# Altium PCB radin_rafatpanah.PcbDoc
Units mm, origin at the board's own origin, x right, y up, seen from the top; angles counter-clockwise.
Board outline 104.78 x 63.25 mm, 2 copper layers (Top Layer, Bottom Layer); 28 components, 23 nets, 114 pads, 12 vias.
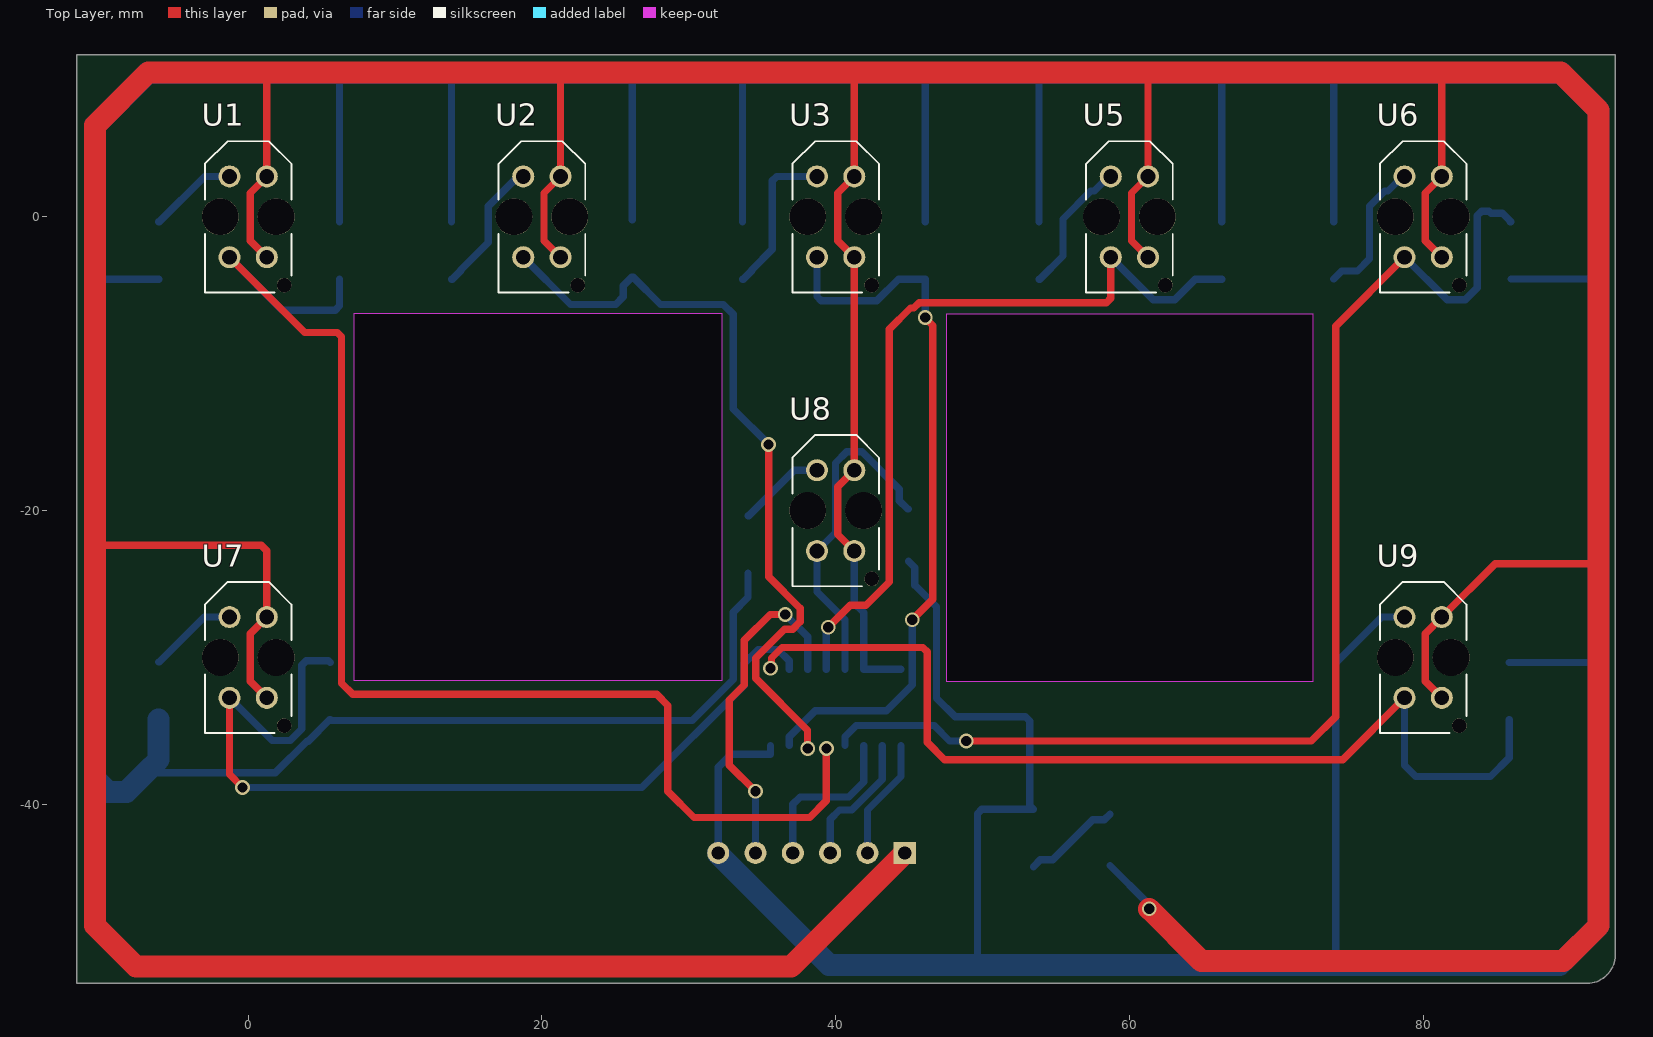
[diagram p0: Top Layer view]
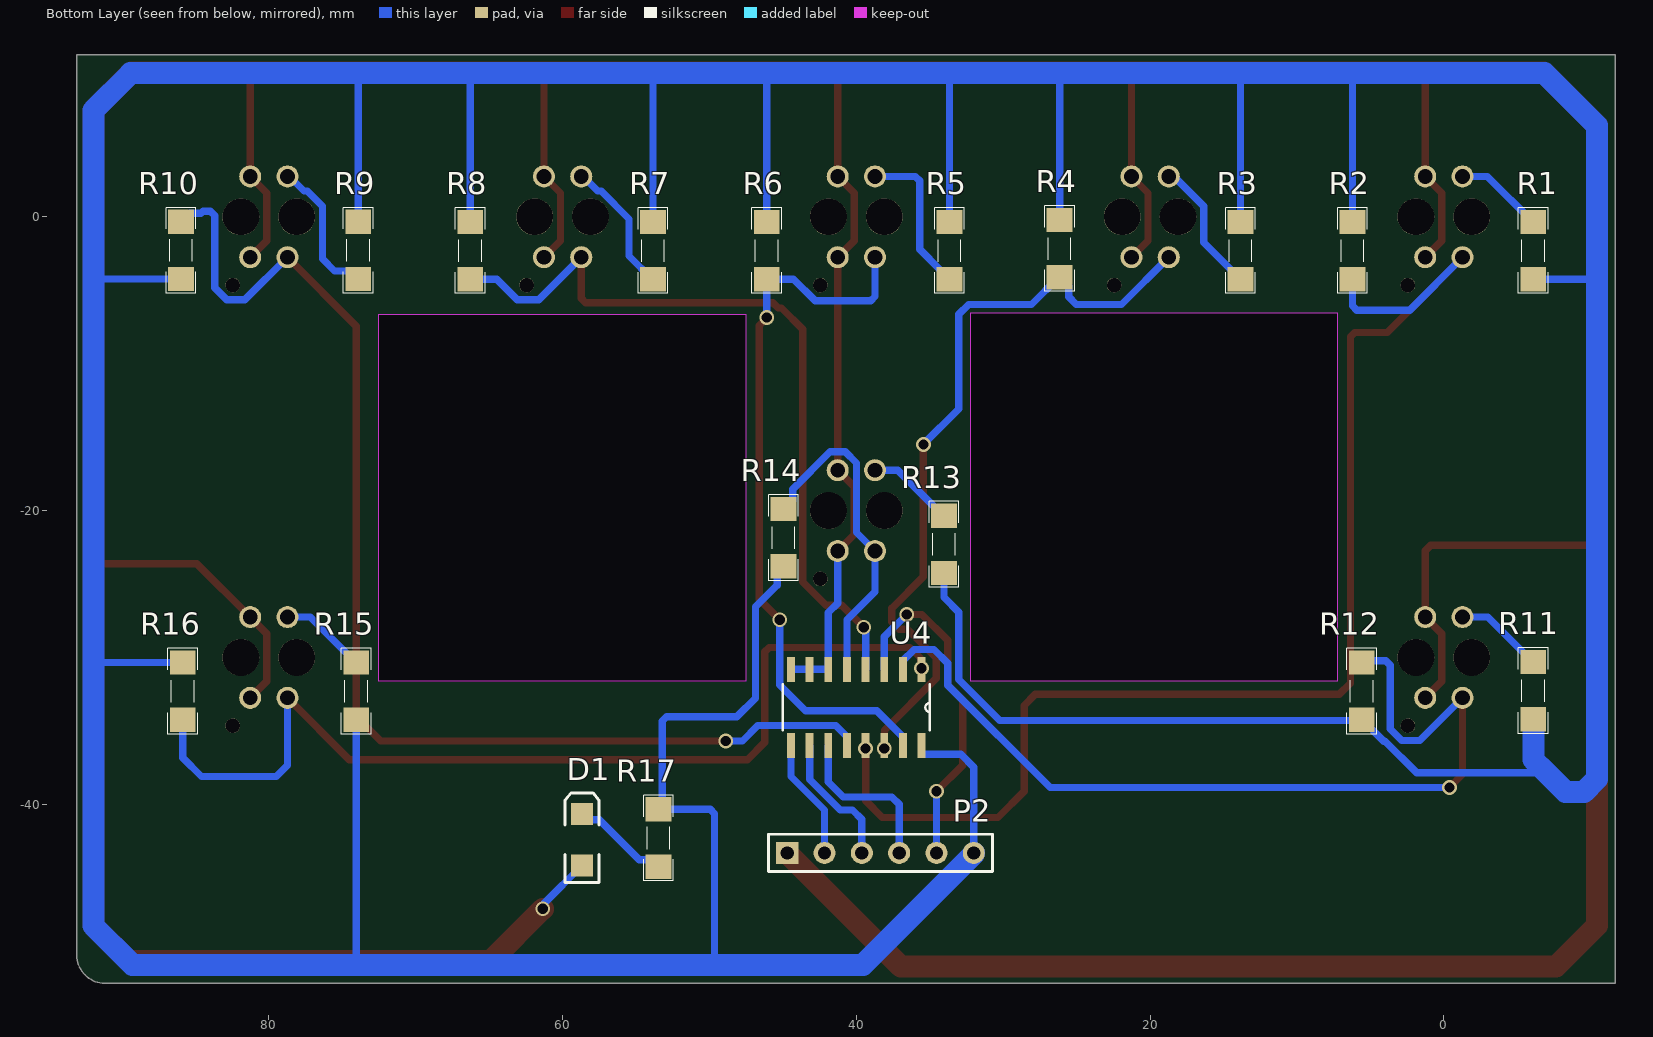
[diagram p1: Bottom Layer view, seen from below]
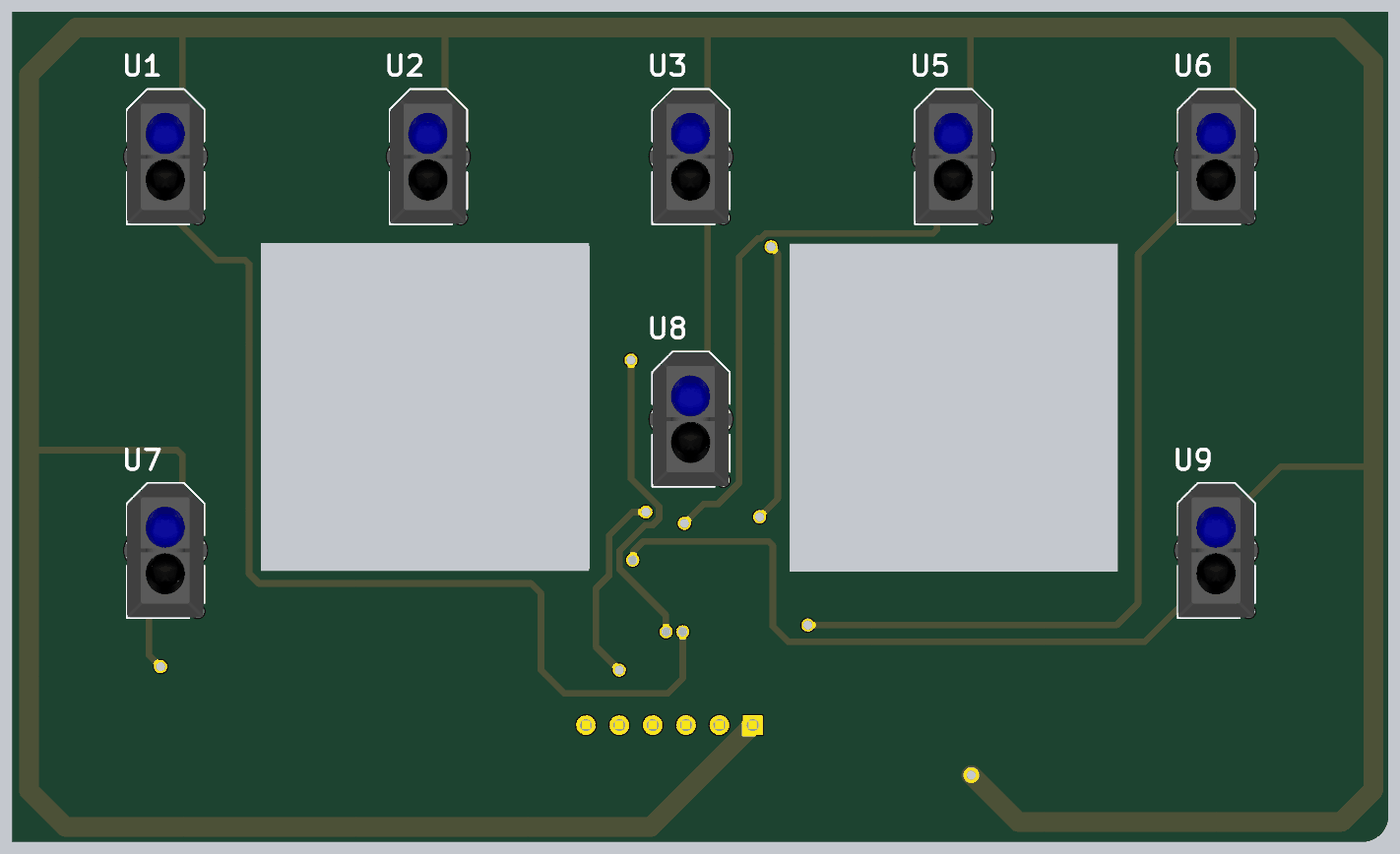
[diagram p2: 3D render of the assembled board from above, using the file's embedded part models]
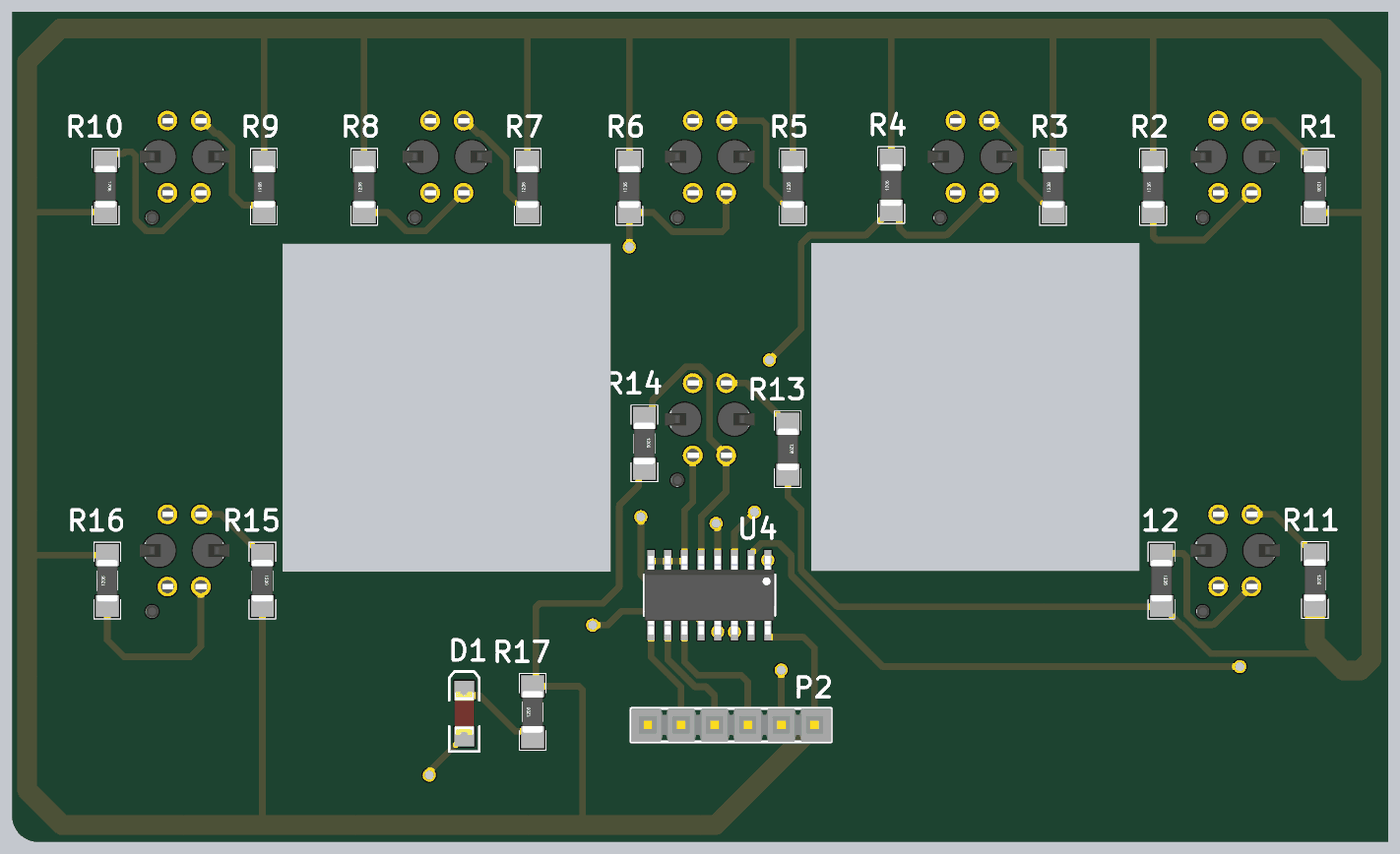
[diagram p3: 3D render of the assembled board from below, using the file's embedded part models]

## Layer stack, top to bottom
Top Solder: solder mask 0.0102, Solder Resist, Dk 3.5
Top Layer: signal copper 0.0356
Dielectric 1: dielectric 0.32, FR-4, Dk 4.8
Bottom Layer: signal copper 0.0356
Bottom Solder: solder mask 0.0102, Solder Resist, Dk 3.5

## Board outline
-11.684,-52.197 -11.684,11.049 93.091,11.049 93.091,-50.29 cw(c91.11,-50.216) 91.184,-52.197
cut-out: 47.517,-31.623 72.517,-31.623 72.517,-6.623 47.517,-6.623
cut-out: 32.239,-31.571 7.239,-31.571 7.239,-6.571 32.239,-6.571

## Design rules (kind name [scope] priority, off if disabled: settings)
Clearance [All] p1: gap=0.254 ignorepadtopadclearanceinfootprint=FALSE except(0: Arc-Hole Track-Hole SMDPad-Hole THPad-Hole Via-Hole Fill-Hole Poly-Hole Region-Hole Text-Hole)
PolygonConnect [All] p1: connectstyle=Relief reliefconductorwidth=0.254 reliefentries=4 polygonreliefangle="90 Angle" airgapwidth=0.254
RoutingVias [All] p1: holewidth=0.711 width=1.27 viastyle="Through Hole" minholewidth=0.711 minwidth=1.27 maxholewidth=0.711 maxwidth=1.27
SolderMaskExpansion [All] p1: expansion=0.102 istentingtop=FALSE
Width [All] p1: maxlimit=2 minlimit=0.5 preferedwidth=1
30 further rules are at their usual default settings.

## Components (designator, comment, footprint, x,y, rotation, side; value= is the part's Value field where it differs from the comment)
D1 "SMD 1206 LED" "LED 1206" 58.674,-42.418 r90 bottom
P2 "Header 6" HDR1X6 44.704,-43.307 r180 bottom
R1 "1K" RESC4817X04N -6.096,-2.296 r270 bottom
R2 "1K" RESC4817X04N 6.223,-2.296 r90 bottom
R3 "1K" RESC4817X04N 13.843,-2.296 r90 bottom
R4 "1K" RESC4817X04N 26.162,-2.159 r90 bottom
R5 "1K" RESC4817X04N 33.655,-2.296 r90 bottom
R6 "1K" RESC4817X04N 46.101,-2.296 r90 bottom
R7 "1K" RESC4817X04N 53.848,-2.296 r90 bottom
R8 "1K" RESC4817X04N 66.294,-2.296 r90 bottom
R9 "1K" RESC4817X04N 73.914,-2.286 r90 bottom
R10 "1K" RESC4817X04N 85.979,-2.286 r270 bottom
R11 "1K" RESC4817X04N -6.096,-32.258 r270 bottom
R12 "1K" RESC4817X04N 5.588,-32.296 r270 bottom
R13 "1K" RESC4817X04N 34.036,-22.296 r270 bottom
R14 "1K" RESC4817X04N 44.958,-21.844 r270 bottom
R15 "1K" RESC4817X04N 74.041,-32.296 r270 bottom
R16 "1K" RESC4817X04N 85.852,-32.296 r90 bottom
R17 "1K" RESC4817X04N 53.467,-42.291 r90 bottom
U1 "TCRT5000" OPTO_TCRT5000 0,0 r90 top
U2 "TCRT5000" OPTO_TCRT5000 20,0 r90 top
U3 "TCRT5000" OPTO_TCRT5000 40,0 r90 top
U4 "74HC4051D" SOIC127P600X175-16N 40.005,-33.401 r270 bottom
U5 "TCRT5000" OPTO_TCRT5000 60,0 r90 top
U6 "TCRT5000" OPTO_TCRT5000 80,0 r90 top
U7 "TCRT5000" OPTO_TCRT5000 0,-30 r90 top
U8 "TCRT5000" OPTO_TCRT5000 40,-20 r90 top
U9 "TCRT5000" OPTO_TCRT5000 80,-30 r90 top

## Footprints (in the part's own frame and the unit in brackets; to place one, negate y for a bottom-side part, rotate by r counter-clockwise, add the part's x,y. Pads: shape width x height; smd on the part's side, far side on the other; paste and mask are expansions set on the pad)
HDR1X6 [mm] "Connector; Header; 6 Position"
  rect 1.5x1.5 hole 0.9: 1(0,0)
  round 1.5 hole 0.9: 2(2.54,0) 3(5.08,0) 4(7.62,0) 5(10.16,0) 6(12.7,0)
  silkscreen extent -1.27,-1.27 13.97,1.27, body extent -1.26,-1.25 13.98,1.29, height 8.38
"LED 1206" [mm]
  rect 1.5x1.5 smd: 1(-1.75,0) 2(1.75,0)
  silkscreen extent -2.9,-1.15 3.2,1.15, body extent -1.65,-0.72 1.65,0.73, height 1.36
OPTO_TCRT5000 [mm]
  round 1.5 hole 1: A(2.75,1.27) CATH(2.75,-1.27) COLL(-2.75,1.27) E(-2.75,-1.27)
  round 1 hole 1 unplated: ""(-4.65,-2.45)
  round 2.5 hole 2.5 unplated: ""(0,1.9) ""(0,-1.9)
  silkscreen extent -5.15,-2.95 5.15,2.95, body extent -5.1,-3.37 5.1,3.43, height 7.2
RESC4817X04N [mm] "Chip Resistor, 2-Leads, Body 4/80x1/70mm, IPC Medium Density-Design:Abbas Basereh"
  rect 1.65x1.75 smd: 1(-1.95,0) 2(1.95,0)
  silkscreen extent -2.92,-1.02 2.92,1.02, body extent -1.6,-0.8 1.6,0.8, height 1
SOIC127P600X175-16N [mil]
  rect 67x21 smd: 1(-102,175) 2(-102,125) 3(-102,75) 4(-102,25) 5(-102,-25) 6(-102,-75) 7(-102,-125) 8(-102,-175) 9(102,-175) 10(102,-125) 11(102,-75) 12(102,-25) 13(102,25) 14(102,75) 15(102,125) 16(102,175)
  silkscreen extent -62,-197 62,197, body extent -118,-195 118,195, height 69

## Part data
D1: library part "LED SMD 1206"
P2: "Header, 6-Pin", LatestRevisionDate=17-Jul-2002, LatestRevisionNote="Re-released for DXP Platform.", Publisher="Altium Limited"
R1 R2 R3 R4 R5 R6 R7 R8 R9 R10 R11 R12 R13 R14 R15 R16 R17: library part "RES 1206 0.25W", "RES 1206", Data=16-12-2016, Desc.="RES SMD 1206", Designer="Abbas Basereh"
U1 U2 U3 U5 U6 U7 U8 U9: "950 nm 60 mA Through Hole Reflective Optical Sensor with Transistor Output", Package=None, Availability=Unavailable, MP=TCRT5000, Price=None
U4: "1 Circuit IC Switch 8:1 130Ohm 16-SOIC", Package="SOIC-16 Toshiba", Availability="In Stock", Check_prices=https://www.snapeda.com/parts/74HC4051D/Toshiba/view-part/?ref=eda, MF=Toshiba, MP=74HC4051D, Price=None, Purchase-URL=https://pricing.snapeda.com/search/part/74HC4051D/?ref=eda, SnapEDA_Link=https://www.snapeda.com/parts/74HC4051D/Toshiba/view-part/?ref=snap

## Via types
v1: diameter 1, hole 0.7, Top Layer to Bottom Layer, 12 vias

## Nets (pads, with @x,y where several pads share a name; then routed paths per layer and width w, separated by ;. In a path a pad name is that pad's centre, name@x,y a point inside that pad or via, vN(x,y) a via of type N, cw(c..) or ccw(c..) an arc to the next point about the centre after c; other vN are vias at no path point)
+5: P2.6 R1.2 R2.2 R3.2 R4.2 R5.2 R6.2 R7.2 R8.2 R9.2 R10.2 R11.2 R12.2 R13.2 R14.2 R15.2 R16.2 R17.2 U4.16 | length 489.6
  Bottom Layer w0.5: -10.414,-4.191 -10.359,-4.246 R1.2 ; -6.921,-37.782 -6.858,-37.846 1.855,-37.846 4.006,-35.695 4.089,-35.695 5.538,-34.246 R12.2 5.632,-34.29 30.233,-34.29 33.02,-31.503 33.02,-26.924 34.036,-25.908 R13.2 ; 6.096,9.779 6.223,9.652 R2.2 ; R3.2 13.843,9.779 ; R4.2 26.162,9.779 ; P2.6 32.004,-37.465 32.876,-36.593 35.543,-36.593 35.56,-36.576 U4.16 ; R5.2 33.655,9.779 ; R14.2@44.958,-23.443 45.396,-23.881 45.396,-25.076 46.863,-26.543 46.863,-32.766 48.133,-34.036 52.92,-34.036 53.213,-34.329 53.213,-40.087 R17.2 49.95,-40.341 49.657,-40.634 49.657,-50.927 ; R6.2 46.101,9.779 ; R7.2 53.848,9.779 ; R8.2 66.294,9.779 ; R9.2 73.914,9.779 ; 74.041,-50.927 R15.2 ; R16.2 91.941,-30.346 91.948,-30.353 ; R10.2 91.776,-4.236 91.948,-4.064
  Bottom Layer w1.5: R11.2 -6.096,-36.957 -6.921,-37.782 -8.293,-39.154 -9.535,-39.154 -10.414,-38.275 -10.414,-4.191 -10.414,6.223 -6.858,9.779 6.096,9.779 13.843,9.779 26.162,9.779 33.655,9.779 46.101,9.779 53.848,9.779 66.294,9.779 73.914,9.779 89.408,9.779 91.948,7.239 91.948,-4.064 91.948,-30.353 91.948,-48.26 89.281,-50.927 74.041,-50.927 49.657,-50.927 39.553,-50.927 32.036,-43.41 32.036,-43.339 P2.6
A0: R2.1 U1.COLL U4.13 | length 88.6
  Top Layer w0.5: U1.COLL 3.854,-7.874 6.057,-7.874 6.35,-8.167 6.35,-31.75 7.112,-32.512 27.813,-32.512 28.575,-33.274 28.575,-39.116 30.353,-40.894 38.227,-40.894 39.37,-39.751 v1(39.37,-36.195)
  Bottom Layer w0.5: U1.COLL 2.33,-6.35 5.93,-6.35 6.223,-6.057 R2.1
A1: R4.1 U2.COLL U4.14 | length 52.4
  Top Layer w0.5: v1(35.433,-15.494) 35.433,-24.511 37.577,-26.655 37.577,-27.574 37.076,-28.075 36.518,-28.075 34.556,-30.037 34.556,-31.417 38.084,-34.945 38.084,-36.179 v1(38.1,-36.195)
  Bottom Layer w0.5: U2.COLL 21.949,-5.969 25.019,-5.969 25.537,-5.451 25.537,-4.684 26.112,-4.109 R4.1 26.212,-4.109 28.072,-5.969 32.35,-5.969 33.02,-6.639 33.02,-13.081 v1(35.433,-15.494)
A2: R6.1 U3.COLL U4.15 | length 49.6
  Top Layer w0.5: v1(45.221,-27.441) 45.221,-27.434 46.609,-26.045 46.609,-7.401 46.101,-6.893 v1(46.101,-6.858)
  Bottom Layer w0.5: U4.15 36.83,-35.408 38.607,-33.63 43.46,-33.63 45.221,-31.87 v1(45.221,-27.441) ; U3.COLL 38.73,-5.422 39.023,-5.715 42.805,-5.715 44.274,-4.246 R6.1@46.051,-4.246 ; v1(46.101,-6.858) 46.101,-4.296 R6.1@46.051,-4.246 ; R6.1 R6.1@46.051,-4.246
A3: R10.1 U4.12 U6.COLL | length 82.8
  Top Layer w0.5: v1(48.895,-35.687) 72.39,-35.687 74.041,-34.036 74.041,-7.439 U6.COLL
  Bottom Layer w0.5: U4.12 40.64,-35.408 41.411,-34.637 46.702,-34.637 47.752,-35.687 v1(48.895,-35.687) ; U6.COLL 81.634,-5.654 82.866,-5.654 83.693,-4.827 83.693,0.088 83.986,0.381 84.486,0.381 84.628,0.239 85.404,0.239 R10.1 R10.1@85.929,-0.336
A4: R16.1 U4.1 U9.COLL | length 67.8
  Top Layer w0.5: v1(35.56,-30.734) 35.626,-30.668 35.626,-30.033 36.342,-29.317 45.935,-29.317 46.228,-29.61 46.228,-35.775 47.41,-36.957 74.523,-36.957 U9.COLL
  Bottom Layer w0.5: U9.COLL 78.73,-37.328 79.502,-38.1 84.582,-38.1 85.852,-36.83 R16.1
A5: R14.1 U4.5 U8.COLL | length 22.7
  Bottom Layer w0.5: U4.5 40.64,-27.432 38.73,-25.522 U8.COLL 39.984,-21.496 39.984,-16.763 40.751,-15.996 41.789,-15.996 44.333,-18.54 44.333,-19.319 44.908,-19.894 R14.1
A6: R12.1 U4.2 U7.COLL | length 62.3
  Top Layer w0.5: U7.COLL -1.27,-37.961 v1(-0.381,-38.85)
  Bottom Layer w0.5: U7.COLL 1.634,-35.654 2.866,-35.654 3.654,-34.866 3.654,-30.519 3.947,-30.226 5.468,-30.226 R12.1 ; v1(-0.381,-38.85) 26.809,-38.85 33.774,-31.885 33.774,-30.391 34.71,-29.455 36.059,-29.455 36.83,-30.226 U4.2
A7: R8.1 U4.4 U5.COLL | length 53.7
  Top Layer w0.5: v1(39.497,-27.94) 40.982,-26.455 42.065,-26.455 43.654,-24.866 43.654,-7.654 45.096,-6.212 45.328,-6.212 45.697,-5.842 58.437,-5.842 58.73,-5.549 U5.COLL
  Bottom Layer w0.5: U4.4 39.37,-28.202 39.497,-28.075 v1(39.497,-27.94) ; U5.COLL 61.634,-5.654 63.083,-5.654 64.491,-4.246 R8.1
AO: P2.5 U4.3 | length 23.5
  Top Layer w0.5: v1(34.544,-39.116) 32.766,-37.338 32.766,-32.893 33.782,-31.877 33.782,-28.829 35.54,-27.071 v1(36.573,-27.071)
  Bottom Layer w0.5: P2.5 v1(34.544,-39.116) ; v1(36.573,-27.071) 38.1,-28.598 U4.3
GND: D1.1 P2.1 U1.CATH U1.E U2.CATH U2.E U3.CATH U3.E U4.6 U4.7 U4.8 U5.CATH U5.E U6.CATH U6.E U7.CATH U7.E U8.CATH U8.E U9.CATH U9.E | length 452.5
  Top Layer w0.5: -10.414,-21.971 -10.033,-22.352 0.889,-22.352 1.27,-22.733 U7.CATH 0.146,-28.374 0.146,-31.626 U7.E ; 1.143,9.906 1.27,9.779 U1.CATH 0.146,1.626 0.146,-1.626 U1.E ; U2.E 20.146,-1.626 20.146,1.626 U2.CATH 21.27,9.84 21.336,9.906 ; U8.E 40.146,-21.626 40.146,-18.374 U8.CATH U3.E 40.146,-1.626 40.146,1.626 U3.CATH 41.27,9.901 41.275,9.906 ; 61.214,9.906 61.27,9.85 U5.CATH 60.146,1.626 60.146,-1.626 U5.E ; U9.E 80.146,-31.626 80.146,-28.374 U9.CATH 84.898,-23.622 91.948,-23.622 ; U6.E 80.146,-1.626 80.146,1.626 U6.CATH 81.27,9.896 81.28,9.906
  Top Layer w1.5: P2.1 36.957,-51.054 -7.62,-51.054 -10.414,-48.26 -10.414,-21.971 -10.414,6.223 -6.797,9.84 1.27,9.84 21.27,9.84 41.27,9.84 61.27,9.84 89.347,9.84 91.948,7.239 91.948,-23.622 91.948,-48.26 89.535,-50.673 64.897,-50.673 v1(61.341,-47.117)
  Bottom Layer w0.5: U8.E 41.27,-26.303 41.91,-26.943 U4.6 U4.7 U4.8 ; D1.1 v1@61.245,-46.739
NetD1_2: D1.2 R17.1 | length 6.7
  Bottom Layer w0.5: R17.1 53.925,-43.783 54.769,-43.783 57.499,-41.053 58.289,-41.053 D1.2
NetR1_1: R1.1 U1.A | length 6.1
  Bottom Layer w0.5: R1.1 -6.046,-0.346 -2.95,2.75 U1.A
NetR3_1: R3.1 U2.A | length 9.3
  Bottom Layer w0.5: R3.1 13.893,-4.246 14.468,-3.671 14.468,-3.621 16.346,-1.743 16.346,0.727 18.178,2.559 18.539,2.559 U2.A
NetR5_1: R5.1 U3.A | length 10.7
  Bottom Layer w0.5: R5.1 33.705,-4.246 34.28,-3.671 34.28,-3.621 35.687,-2.214 35.687,2.457 35.98,2.75 U3.A
NetR7_1: R7.1 U5.A | length 9.3
  Bottom Layer w0.5: R7.1 53.898,-4.246 55.477,-2.667 55.477,-0.143 57.373,1.754 57.605,1.754 58.601,2.75 U5.A
NetR9_1: R9.1 U6.A | length 9.8
  Bottom Layer w0.5: R9.1 74.467,-3.683 75.526,-3.683 76.346,-2.863 76.346,0.727 77.373,1.754 77.605,1.754 78.601,2.75 U6.A
NetR11_1: R11.1 U7.A | length 6.1
  Bottom Layer w0.5: R11.1 -6.046,-30.308 -2.988,-27.25 U7.A
NetR13_1: R13.1 U8.A | length 6
  Bottom Layer w0.5: R13.1 34.086,-20.346 37.182,-17.25 U8.A
NetR15_1: R15.1 U9.A | length 6
  Bottom Layer w0.5: R15.1 74.091,-30.346 77.187,-27.25 U9.A
P1: P2.4 U4.11 | length 11.2
  Bottom Layer w0.5: P2.4 37.084,-40.005 37.592,-39.497 40.894,-39.497 41.91,-38.481 U4.11
P2: P2.3 U4.10 | length 9.3
  Bottom Layer w0.5: P2.3 39.624,-41.021 40.259,-40.386 41.098,-40.386 43.18,-38.304 U4.10
P3: P2.2 U4.9 | length 8.3
  Bottom Layer w0.5: P2.2 42.164,-40.386 44.45,-38.1 U4.9
pads on no net: U1. U2. U3. U5. U6. U7. U8. U9.

## Silkscreen, mask and mechanical layers (free items; w line width, h text height)
Mechanical 1:
  lines w0.254: 7.239,-31.571 32.239,-31.571 32.239,-6.571 7.239,-6.571 7.239,-31.571 ; 47.517,-31.623 72.517,-31.623 72.517,-6.623 47.517,-6.623 47.517,-31.623